# Altium PCB PCB1ver2.PcbDoc
Units mil, origin at the board's own origin, x right, y up, seen from the top; angles counter-clockwise.
Board outline 6000 x 4000 mil, 2 copper layers (Top Layer, Bottom Layer); 33 components, 22 nets, 141 pads, 0 vias.
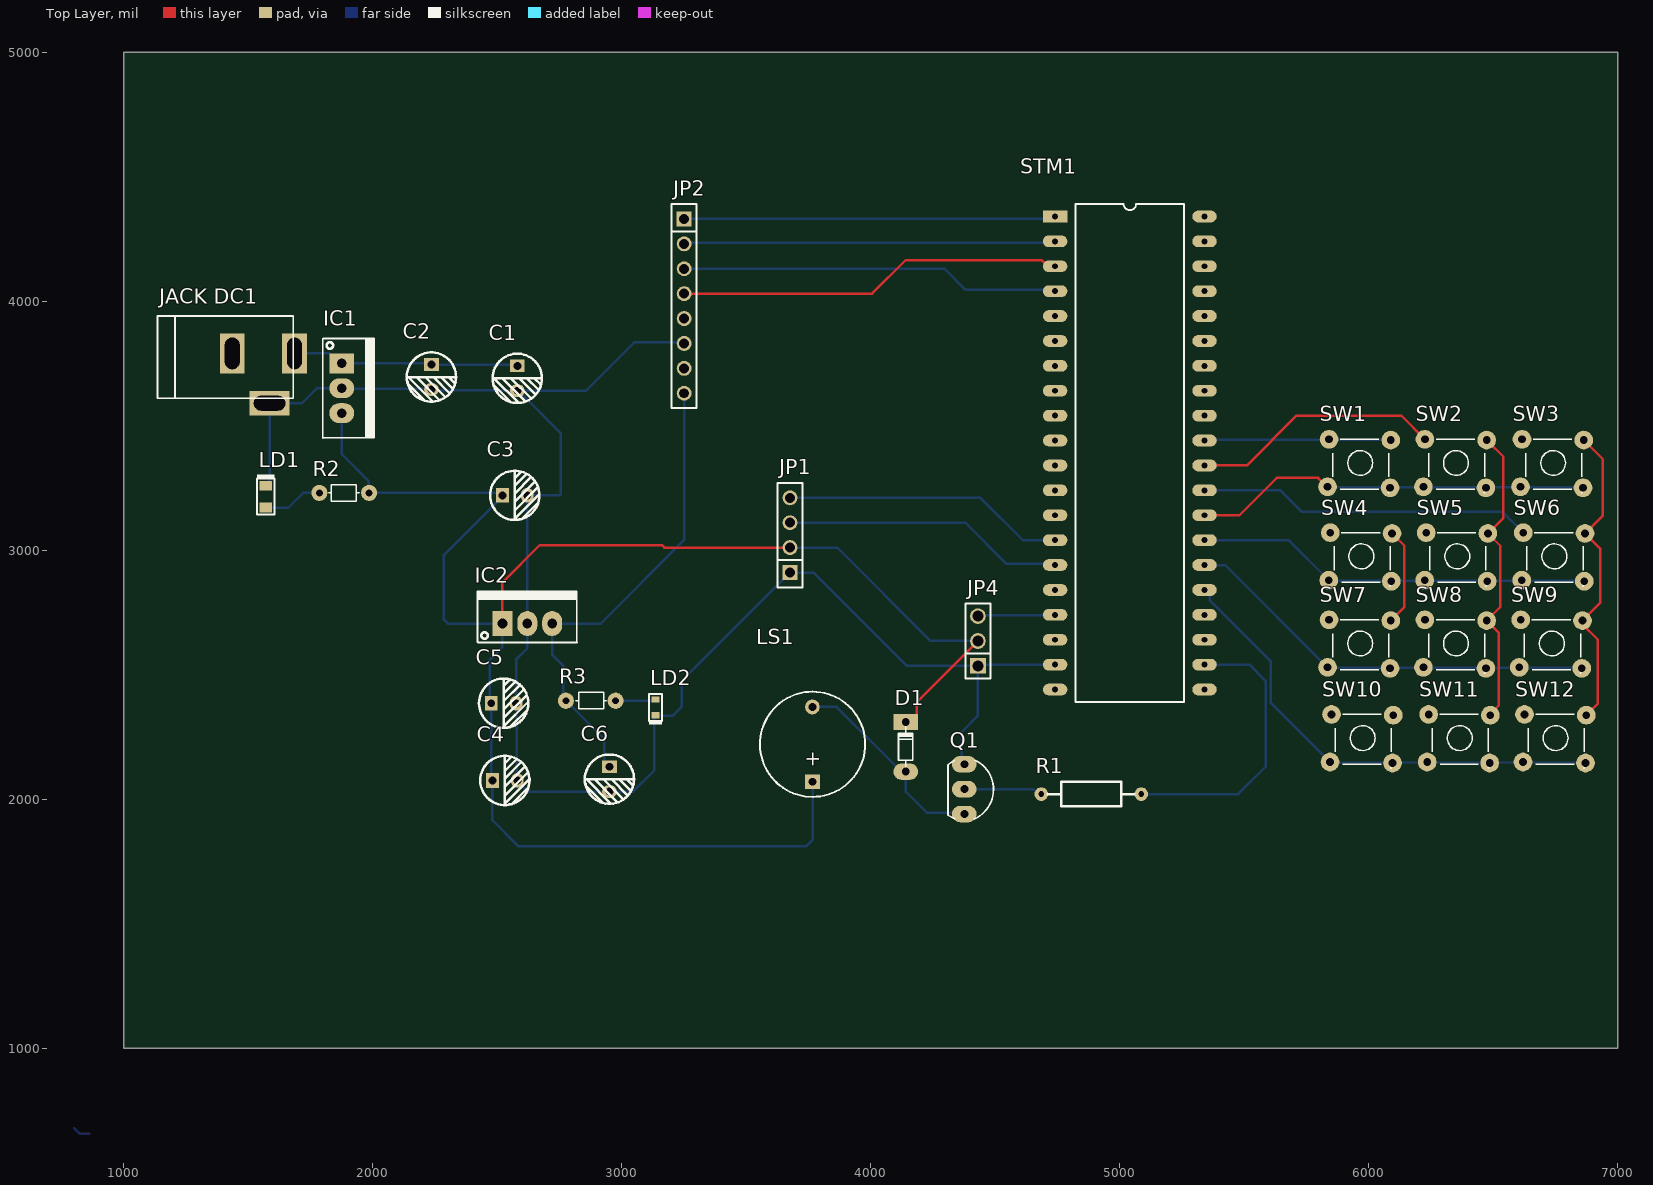
[diagram p0: Top Layer view]
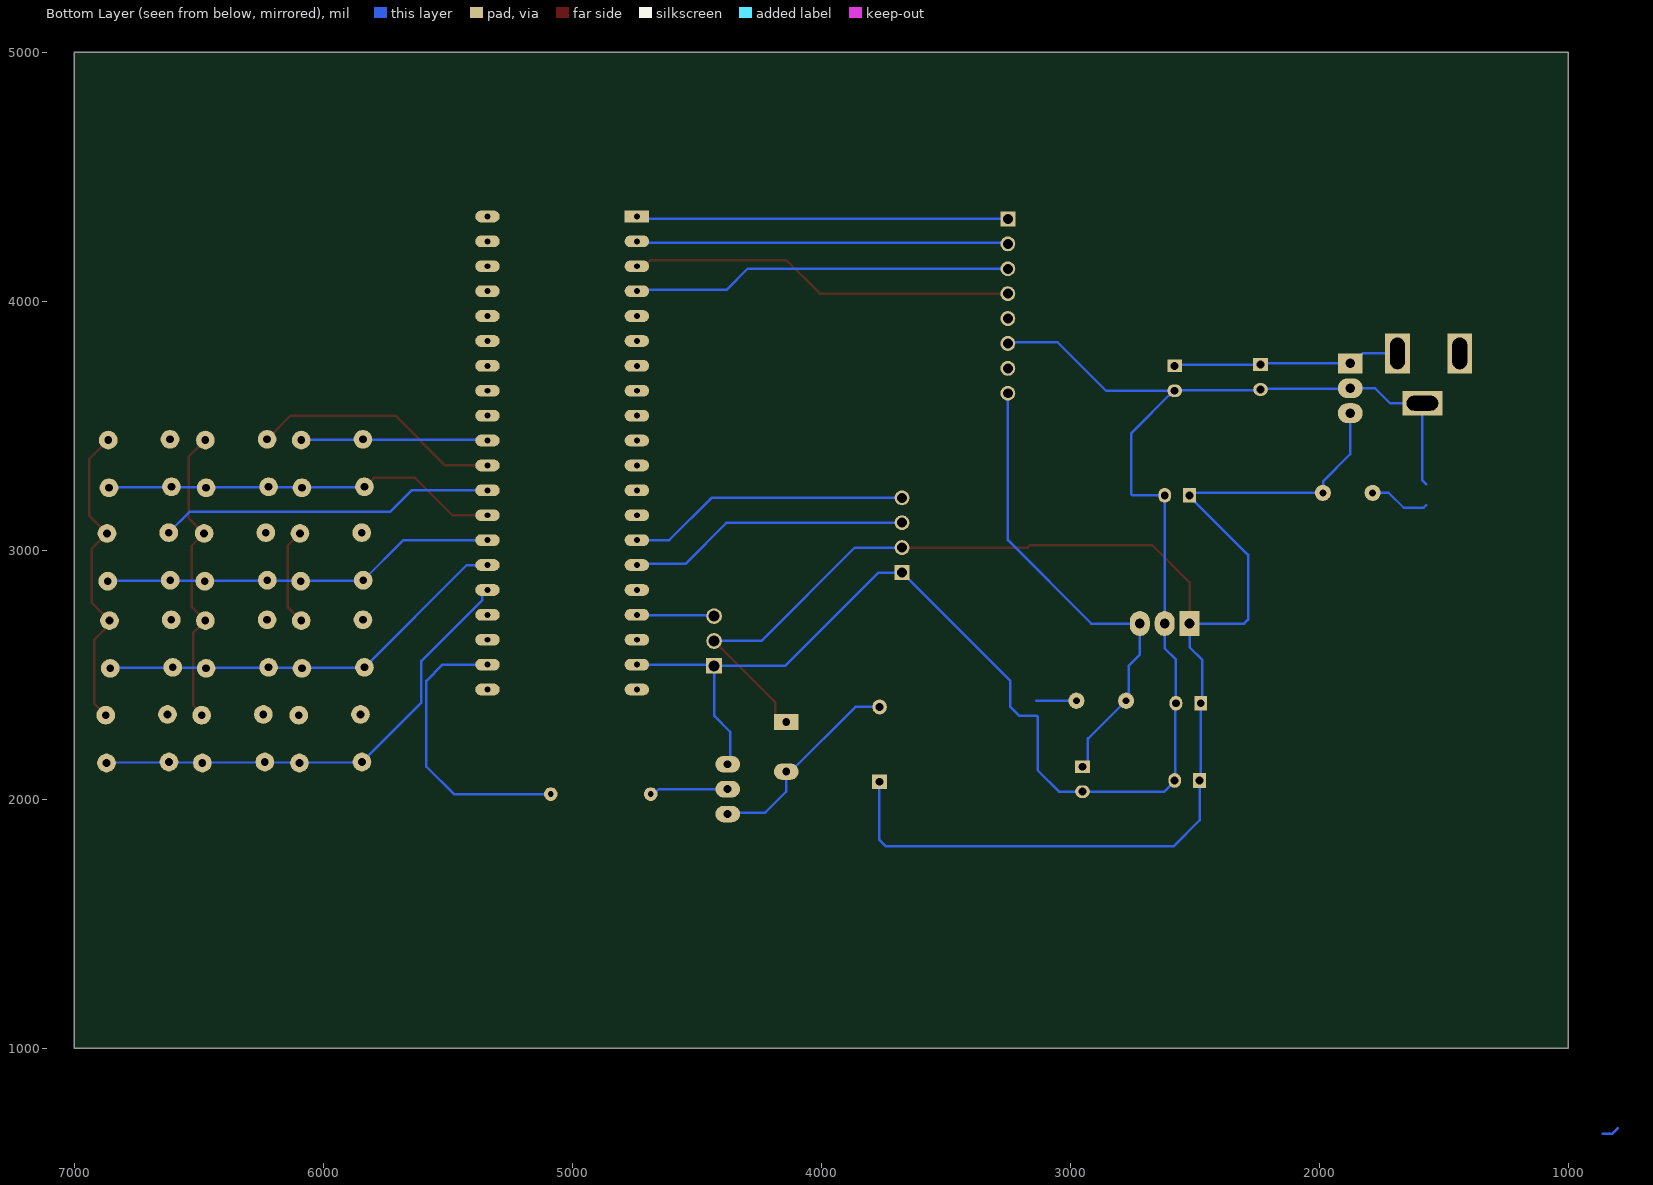
[diagram p1: Bottom Layer view, seen from below]

## Layer stack, top to bottom
Top Solder: solder mask 0.4, Solder Resist, Dk 3.5
Top Layer: signal copper 1.4
Dielectric 1: dielectric 12.6, FR-4, Dk 4.8
Bottom Layer: signal copper 1.4
Bottom Solder: solder mask 0.4, Solder Resist, Dk 3.5

## Board outline
1000,1000 7000,1000 7000,5000 1000,5000

## Design rules (kind name [scope] priority, off if disabled: settings)
Clearance [All] p1: gap=10 ignorepadtopadclearanceinfootprint=FALSE
PolygonConnect [All] p1: connectstyle=Relief reliefconductorwidth=10 reliefentries=4 polygonreliefangle="90 Angle" airgapwidth=10
RoutingVias [All] p1: holewidth=28 width=50 viastyle="Through Hole" minholewidth=28 minwidth=50 maxholewidth=28 maxwidth=50
SolderMaskExpansion [All] p1: expansion=4 istentingtop=FALSE
SupplyNets "Schematic Supply Nets_3" [InNet('+5')] p1: voltage=0.000
SupplyNets "Schematic Supply Nets_2" [InNet('GND')] p2: voltage=0.000
SupplyNets "Schematic Supply Nets_1" [InNet('+9')] p3: voltage=0.000
SupplyNets "Schematic Supply Nets" [InNet('+3.3')] p4: voltage=0.000
Width [All] p1: maxlimit=10 minlimit=10 preferedwidth=10
30 further rules are at their usual default settings.

## Components (designator, comment, footprint, x,y, rotation, side; value= is the part's Value field where it differs from the comment)
C1 "0.1uF" "tu hoa 5mm" 2580,3690 r270 top
C2 "1uF" "tu hoa 5mm" 2235,3695 r270 top
C3 "1uF" "tu hoa 5mm" 2570,3220 r0 top
C4 "0.1uF" "tu hoa 5mm" 2530,2075 r0 top
C5 "1uF" "tu hoa 5mm" 2525,2385 r0 top
C6 "1uF" "tu hoa 5mm" 2950,2080 r270 top
D1 "100v" "DIODE 0.5A" 4140,2210 r270 top
IC1 "LM7805" QTO-220 1875,3750 r270 top
IC2 "LM1117" QTO-220 2520,2705 r0 top value=LM7805
"JACK DC1" "JACK DC 5.5" "JACK DC 5.5" 1560,3690 r0 top value="Jac DC"
JP1 "JP 1x4 2.54" "JP 1x4 CT" 3675,2910 r90 top
JP2 "JP 1x8 2.54" "JP 1x8 CT" 3250,4330 r270 top
JP4 "JP 1x3 2.54" "JP 1x3 DT" 4430,2535 r90 top
LD1 "LED-GREEN" LED_SMD0805_GREEN 1570,3215 r90 top
LD2 "LED-RED" LED_SMD0603_RED 3135,2368.5 r270 top
LS1 "Coi Chip Speaker" "Coi Chip Speacker" 3765.5,2070 r90 top
Q1 "2N222" TO92 4375,2040 r270 top value=C9014
R1 "15k" "tro vach 1/4w" 4885,2020 r180 top
R2 "1k" R1/8W 1885,3230 r180 top value="R1/4W - 1K"
R3 "1k" R1/8W 2875,2395 r0 top value="R1/4W - 1K"
STM1 "KIT STM32F103C8T6" "STM32F103 KIT" 4740,4340 r0 top
SW1 "SW" SW4 5840,3445 r0 top value="Button chip 4 pin"
SW2 "SW" SW4 6225,3445 r0 top value="Button chip 4 pin"
SW3 "SW" SW4 6615,3445 r0 top value="Button chip 4 pin"
SW4 "SW" SW4 5845,3070 r0 top value="Button chip 4 pin"
SW5 "SW" SW4 6230,3070 r0 top value="Button chip 4 pin"
SW6 "SW" SW4 6620,3070 r0 top value="Button chip 4 pin"
SW7 "SW" SW4 5840,2720 r0 top value="Button chip 4 pin"
SW8 "SW" SW4 6225,2720 r0 top value="Button chip 4 pin"
SW9 "SW" SW4 6610,2720 r0 top value="Button chip 4 pin"
SW10 "SW" SW4 5850,2340 r0 top value="Button chip 4 pin"
SW11 "SW" SW4 6240,2340 r0 top value="Button chip 4 pin"
SW12 "SW" SW4 6625,2340 r0 top value="Button chip 4 pin"

## Footprints (in the part's own frame and the unit in brackets; to place one, negate y for a bottom-side part, rotate by r counter-clockwise, add the part's x,y. Pads: shape width x height; smd on the part's side, far side on the other; paste and mask are expansions set on the pad)
"Coi Chip Speacker" [mm]
  rect 1.5x1.5 hole 0.8: 1(0,0)
  round 1.5 hole 0.8: 2(7.62,0.013)
  silkscreen extent -1.55,-5.38 9.18,5.36, body extent -2.22,-6 13.24,6, height 4.5
"DIODE 0.5A" [mil] "Diode muoi, xung"
  oval 65x100 hole 32: 1(100,0)
  rect 65x100 hole 32: 2(-100,0)
  silkscreen extent -80,-30 80,28, body extent -108,-33 108,32, height 61
"JACK DC 5.5" [mil] "Jac DC input"
  rect 100x160 hole 59.06 slot 125.98 at 90 deg: 1(125,100) 2(-125,100)
  rect 160x100 hole 59.06 slot 125.98 at 0 deg: 3(25,-100)
  silkscreen extent -425,-80 120,250, body extent -410,-105 134,269, height 434
"JP 1x3 DT" [mm]
  rect 1.6x1.6 hole 1.1: 1(0,0)
  round 1.6 hole 1.1: 2(2.54,0) 3(5.08,0)
  silkscreen extent -1.27,-1.27 6.35,1.27, body extent -1.27,-1.27 6.35,1.27, height 8.54
"JP 1x4 CT" [mm]
  rect 1.52x1.52 hole 1.02: 1(0,0)
  round 1.52 hole 1.02: 2(2.54,0) 3(5.08,0) 4(7.62,0)
  silkscreen extent -1.52,-1.27 9.14,1.27, body extent -1.52,-1.25 9.14,1.25, height 8.51
"JP 1x8 CT" [mm] "8 row, straight, gold plating"
  rect 1.52x1.52 hole 1.02: 1(0,0)
  round 1.52 hole 1.02: 2(2.54,0) 3(5.08,0) 4(7.62,0) 5(10.16,0) 6(12.7,0) 7(15.24,0) 8(17.78,0)
  silkscreen extent -1.52,-1.27 19.3,1.27, body extent -1.52,-1.25 19.3,1.25, height 8.51
LED_SMD0603_RED [mm]
  rect 0.65x0.85 smd: 1(-0.8,0) 2(0.8,0)
  silkscreen extent -1.38,-0.67 1.75,0.68, body extent -0.86,-0.45 0.85,0.45, height 0.9
LED_SMD0805_GREEN [mm]
  rect 1x1.3 smd: 1(-1.1,0) 2(1.1,0)
  silkscreen extent -1.85,-0.9 2.23,0.9, body extent -1.19,-0.75 1.21,0.75, height 0.9
QTO-220 [mil] "TO-220 - 1-2-3"
  rect 80x100 hole 39: 1(0,0)
  oval 80x100 hole 39: 2(100,0) 3(200,0)
  silkscreen extent -100,-76 300,130, body extent -121,-85 321,100, height 755
R1/8W [mil] "R 1/8W, 2 pin, 300mil"
  round 65 hole 28: 1(-100,0) 2(100,0)
  silkscreen extent -60,-32 61,34, body extent -135,-35 135,37, height 86
"STM32F103 KIT" [mm]
  rect 2.5x1.2 hole 0.6: 1(0,0)
  oval 2.5x1.2 hole 0.6: 2(0,-2.54) 3(0,-5.08) 4(0,-7.62) 5(0,-10.16) 6(0,-12.7) 7(0,-15.24) 8(0,-17.78) 9(0,-20.32) 10(0,-22.86) 11(0,-25.4) 12(0,-27.94) 13(0,-30.48) 14(0,-33.02) 15(0,-35.56) 16(0,-38.1) 17(0,-40.64) 18(0,-43.18) 19(0,-45.72) 20(0,-48.26) 21(15.24,-48.26) 22(15.24,-45.72) 23(15.24,-43.18) 24(15.24,-40.64) 25(15.24,-38.1) 26(15.24,-35.56) 27(15.24,-33.02) 28(15.24,-30.48) 29(15.24,-27.94) 30(15.24,-25.4) 31(15.24,-22.86) 32(15.24,-20.32) 33(15.24,-17.78) 34(15.24,-15.24) 35(15.24,-12.7) 36(15.24,-10.16) 37(15.24,-7.62) 38(15.24,-5.08) 39(15.24,-2.54) 40(15.24,0)
  silkscreen extent 2.08,-49.53 13.16,1.27, body extent -3.81,-53.97 19.05,3.59, height 16.12
SW4 [mil] "SW button 4pin, 250 x250 mil"
  round 75 hole 31: 1(0,0) 2(245,-195) 3(248,-3) 4(-6,-191)
  silkscreen extent 15,-215 240,0, body extent -36,-220 276,24, height 276
TO92 [mil] "TO-92"
  oval 66x100 hole 32: 1(-100,0) 2(0,0) 3(100,0)
  silkscreen extent -117,-65 120,118, body extent -109,-66 109,95, height 245
"tro vach 1/4w" [mm]
  round 1.4 hole 0.6: 1(-5.1,0) 2(5.1,0)
  silkscreen extent -4.39,-1.25 4.42,1.25, body extent -5.38,-1.2 5.38,1.2, height 2.41
"tu hoa 5mm" [mm]
  rect 1.3x1.5 hole 0.8: 1(-1.27,0)
  oval 1.3x1.5 hole 0.8: 2(1.27,0)
  silkscreen extent -2.51,-2.51 2.51,2.51, body extent -3.12,-3.18 3.23,3.18, height 14.55

## Part data
C1 C4: library part "Tu Hoa 0.1uF 50V 5x11", "Cắm", Chung_Loai=Cắm, Don_Vi=Con, Ma_Hang=MH006853, So_Chan=2, Ten_Linh_Kien="Tụ Hóa 0.1uF 50V"
C2 C3 C5 C6: library part "Tu Hoa 1uF 400V 6x10", "Cắm", Chung_Loai=Cắm, Don_Vi=Con, Ma_Hang=MH003742, So_Chan=2, Ten_Linh_Kien="Tụ Hóa 1uF 400V 6x10MM"
D1: library part "Diode 1N4148", "Cắm", Chung_Loai=Cắm, Don_Vi=Con, Ma_Hang=MH001065, Ten_Linh_Kien="Diode 1N4148 DO35 450mA 100V ( 1N4148 DIP)"
IC1 IC2: library part LM78xx, "On ap +, from + 5 to + 24VDC"
JP1: library part "JP 1x4 2.54 Cai Thang", "Cắm", Chung_Loai=Cắm, Don_Vi=Con, Ma_Hang=MH004006, Ten_Linh_Kien="Jump Đơn Cái 2.54MM 1x20P Thẳng"
JP2: library part "JP 1x8 2.54 Cai Thang", "Cắm", Chung_Loai=Cắm, Don_Vi=Con, Ma_Hang=MH004006, Ten_Linh_Kien="Jump Đơn Cái 2.54MM 1x20P Thẳng"
JP4: library part "JP 1x3 2.54 Duc Thang", "Cắm", Chung_Loai=Cắm, Don_Vi=Con, Ma_Hang=MH000903, Ten_Linh_Kien="Jump Đơn Đực 2.54MM 1x40P Thẳng 11MM"
LD1: library part LED_LTST-C171KGKT, "LED GREEN CLEAR 0805 SMD", Color=Green, Current - Test=20mA, Lens Color=Colorless, Manufacturer="Lite-On Inc.", Manufacturer Part Number=LTST-C171KGKT, Millicandela Rating=35mcd, Package / Case="0805 (2012 Metric)", Supplier Part Number 1=160-1426-1-ND, Voltage - Forward (Vf) (Typ)=2V, Category=Optoelectronics, ComponentLink1Description=http://optoelectronics.liteon.com/upload/download/DS22-2000-118/LTST-C171KGKT.pdf, ComponentLink1URL=http://optoelectronics.liteon.com/upload/download/DS22-2000-118/LTST-C171KGKT.pdf, Features=-, Height (Max)=0.90mm, Lens Style/Size="Rectangle with Flat Top, 1.40mm x 1.25mm", Lens Transparency=Clear, Mounting Type="Surface Mount", Packaging="Cut Tape (CT)", Part Status=Active, Pricing 1="1=0.35, 10=0.255, 25=0.188, 100=0.1344, 250=0.09136, 500=0.08062, 1000=0.06314 (USD)", RoHS="RoHS Compliant", Size / Dimension="2.00mm L x 1.25mm W", Stock 1=329702, Supplier 1=Digi-Key, Viewing Angle=130°, Wavelength - Dominant=571nm, Wavelength - Peak=574nm
LD2: library part LED_LTST-C191KRKT, "LED RED CLEAR 0603 SMD", Color=Red, Current - Test=20mA, Lens Color=Colorless, Manufacturer="Lite-On Inc.", Manufacturer Part Number=LTST-C191KRKT, Millicandela Rating=54mcd, Package / Case="0603 (1608 Metric)", Supplier Part Number 1=160-1447-6-ND, Voltage - Forward (Vf) (Typ)=2V, Category=Optoelectronics, ComponentLink1Description=http://optoelectronics.liteon.com/upload/download/DS22-2000-223/LTST-C191KRKT.PDF, ComponentLink1URL=http://optoelectronics.liteon.com/upload/download/DS22-2000-223/LTST-C191KRKT.PDF, Features=-, Height (Max)=0.65mm, Lens Style/Size="Rectangle with Flat Top, 1.10mm x 0.80mm", Lens Transparency=Clear, Mounting Type="Surface Mount", Packaging=Digi-Reel®, Part Status=Active, Pricing 1="1=0.29, 10=0.211, 25=0.1556, 100=0.1111, 250=0.07556, 500=0.06666, 1000=0.05222, 2500=0.05111 (USD)", RoHS="RoHS Compliant", Size / Dimension="1.60mm L x 0.80mm W", Stock 1=711347, Supplier 1=Digi-Key, Viewing Angle=130°, Wavelength - Dominant=631nm, Wavelength - Peak=639nm
LS1: "Còi chip"
Q1: library part "Trans 2N3904", "NPN transistor EBC"
R1: library part "Tro Vach 1/4W 5% 15k", "Cắm", Chung_Loai=Cắm, Don_Vi=Con, Ma_Hang=MH007288, So_Chan=2, Ten_Linh_Kien="Trở Vạch 1/4w 5% 15k"
R2 R3: library part Res, "Resistor 1/4W"
STM1: library part "STM32f103 Bluepill", "KIT STM32F103C8T6 Bluepill"
SW1 SW2 SW3 SW4 SW5 SW6 SW7 SW8 SW9 SW10 SW11 SW12: library part SW4, "Switch button 4 pin"

## Nets (pads, with @x,y where several pads share a name; then routed paths per layer and width w, separated by ;. In a path a pad name is that pad's centre, name@x,y a point inside that pad or via, vN(x,y) a via of type N, cw(c..) or ccw(c..) an arc to the next point about the centre after c; other vN are vias at no path point)
+3.3: 
+5: 
+9: 
A10: 
C1: 
C2: 
C3: 
GND: 
MISO: 
MOSI: 
NetD?_1: 
NetLD?_1: 
NetQ?_2: 
PWM: 
R1: 
R2: 
R3: 
R4: 
SCK: 
SCL: 
SDA_1: 
SDA_2: 
pads on no net: "JACK DC1.1" "JACK DC1.2" "JACK DC1.3" C1.1 C1.2 C2.1 C2.2 C3.1 C3.2 C4.1 C4.2 C5.1 C5.2 C6.1 C6.2 D1.1 D1.2 IC1.1 IC1.2 IC1.3 IC2.1 IC2.2 IC2.3 JP1.1 JP1.2 JP1.3 JP1.4 JP2.1 JP2.2 JP2.3 JP2.4 JP2.5 JP2.6 JP2.7 JP2.8 JP4.1 JP4.2 JP4.3 LD1.1 LD1.2 LD2.1 LD2.2 LS1.1 LS1.2 Q1.1 Q1.2 Q1.3 R1.1 R1.2 R2.1 R2.2 R3.1 R3.2 STM1.1 STM1.2 STM1.3 STM1.4 STM1.5 STM1.6 STM1.7 STM1.8 STM1.9 STM1.10 STM1.11 STM1.12 STM1.13 STM1.14 STM1.15 STM1.16 STM1.17 STM1.18 STM1.19 STM1.20 STM1.21 STM1.22 STM1.23 STM1.24 STM1.25 STM1.26 STM1.27 STM1.28 STM1.29 STM1.30 STM1.31 STM1.32 STM1.33 STM1.34 STM1.35 STM1.36 STM1.37 STM1.38 STM1.39 STM1.40 SW1.1 SW1.2 SW1.3 SW1.4 SW2.1 SW2.2 SW2.3 SW2.4 SW3.1 SW3.2 SW3.3 SW3.4 SW4.1 SW4.2 SW4.3 SW4.4 SW5.1 SW5.2 SW5.3 SW5.4 SW6.1 SW6.2 SW6.3 SW6.4 SW7.1 SW7.2 SW7.3 SW7.4 SW8.1 SW8.2 SW8.3 SW8.4 SW9.1 SW9.2 SW9.3 SW9.4 SW10.1 SW10.2 SW10.3 SW10.4 SW11.1 SW11.2 SW11.3 SW11.4 SW12.1 SW12.2 SW12.3 SW12.4
copper on no net: | length 41253.5
  Top Layer w10: 2520,2705 2520,2870 2670,3020 3160.76,3020 3170.76,3010 3675,3010 ; 3250,4030 4005,4030 4140,4165 4684.79,4165 4709.79,4140 4740,4140 ; 4140,2310 4157.5,2310 4185,2337.5 4185,2390 4430,2635 ; 5340,3140 5480,3140 5630,3290 5795.75,3290 5831.75,3254 5834,3254 ; 5340,3340 5510,3340 5710,3540 6130,3540 6225,3445 ; 5835,2725 5840,2720 ; 6085,3250 6090,3245 ; 6088,2717 6142.5,2771.5 6142.5,3017.5 6093,3067 ; 6088,3442 6088,3437 6090,3435 ; 6460,3250 6470,3250 ; 6473,3442 6473,3437 6475,3435 6480,3435 6540,3375 6540,3129 6478,3067 6527.5,3017.5 6527.5,2771.5 6473,2717 6522.5,2667.5 6522.5,2376.75 6488,2342.25 6488,2337 ; 6863,3442 6940,3365 6940,3139 6868,3067 6930,3005 6930,2789 6858,2717 6858,2702 6920,2640 6920,2384 6873,2337
  Bottom Layer w10: 800,678.43 823.43,655 860,655 ; 1570,3180 1580,3170 1660,3170 1720,3230 1785,3230 ; 1570,3265 1585,3280 1585,3590 1715,3590 1775,3650 1875,3650 1877.5,3647.5 2232.5,3647.5 2235,3645 2237.5,3642.5 2577.5,3642.5 2580,3640 2583.94,3640 ; 1685,3790 1825,3790 1865,3750 1875,3750 2230,3750 2235,3745 2575,3745 2580,3740 ; 1875,3550 1875,3385 1982.5,3277.5 1982.5,3232.5 1985,3230 2510,3230 2520,3220 2520,3216.06 2285,2981.06 2285,2720.86 2300.86,2705 2520,2705 2520,2610 2470,2560 2470,2390 2475,2385 2475,2080 2480,2075 2480,1915 2585,1810 3740,1810 3765.86,1835.86 3765.86,1940.49 3765.5,1940.84 3765.5,2070 ; 2940,2135 2929.14,2145.86 2929.14,2245 2925,2245 2775,2395 2765,2405 2765,2535 2720,2580 2720,2705 2915,2705 3250,3040 3250,3630 ; 2975,2395 3135,2395 ; 3250,3830 3245,3835 3050,3835 2855,3640 2583.94,3640 ; 3250,4130 4295,4130 4380,4045 4735,4045 4740,4040 ; 3250,4230 3255,4235 4735,4235 4740,4240 ; 3250,4330 4730,4330 4740,4340 ; 3675,3010 3865,3010 4240,2635 4430,2635 ; 3675,3110 4380,3110 4545,2945 4735,2945 4740,2940 ; 3675,3210 4440,3210 4610,3040 4740,3040 ; 3765,2370 3862.5,2370 4122.5,2110 4140,2110 4140,2030 4225,1945 4370,1945 4375,1940 ; 4375,2040 4652,2040 4672,2020 4684.21,2020 ; 4375,2140 4365,2150 4365,2270 4430,2335 4430,2535 ; 4430,2735 4432.5,2737.5 4737.5,2737.5 4740,2740 ; 4740,2540 4435,2540 4430,2535 ; 5085.79,2020 5475,2020 5585,2130 5585,2475 5520,2540 5340,2540 ; 5340,2840 5343.39,2840 5360.59,2822.8 5360.59,2799.62 5605,2555.21 5605,2388 5844,2149 5846,2147 6093,2147 6095,2145 6097,2147 6232,2147 6234,2149 6236,2147 6483,2147 6485,2145 6487,2147 6617,2147 6619,2149 6621,2147 6868,2147 6870,2145 ; 5340,2940 5423,2940 5834,2529 5836,2527 6083,2527 6085,2525 6087,2527 6217,2527 6219,2529 6221,2527 6468,2527 6470,2525 6472,2527 6602,2527 6604,2529 6606,2527 6853,2527 6855,2525 ; 5340,3040 5678,3040 5839,2879 5841,2877 6088,2877 6090,2875 6092,2877 6222,2877 6224,2879 6226,2877 6473,2877 6475,2875 6477,2877 6612,2877 6614,2879 6616,2877 6863,2877 6865,2875 ; 5340,3240 5645,3240 5730,3155 6535,3155 6620,3070 ; 5340,3440 5342.5,3442.5 5837.5,3442.5 5838.5,3443.5 ; 5834,3254 5836,3252 6083,3252 6085,3250 6087,3252 6217,3252 6219,3254 6221,3252 6468,3252 6470,3250 6472,3252 6607,3252 6609,3254 6611,3252 6858,3252 6860,3250 ; 5840,3445 5838.5,3443.5 ; 6088,3442 6086.5,3443.5 5838.5,3443.5 ; 2583.94,3640 2755,3468.94 2755,3225.86 2749.14,3220 2620,3220 2620,2705 2620,2605 2575,2560 2575,2385 2577.5,2382.5 2577.5,2077.5 2580,2075 2580,2071.06 2621.06,2030 2950,2030 3045,2030 3130,2115 3130,2330 3135,2335 3205,2335 3240,2370 3240,2475 3675,2910 3770,2910 4145,2535 4430,2535

## Text inside footprints (layer, text, board x,y; h text height)
LS1: Top Overlay "+" at 3793.5,2125.5 h60 r90